# Altium PCB FMC_DIO_32ch_lvds_a.PcbDoc (part 2 of 6)
Units mm, origin at the board's own origin, x right, y up, seen from the top; angles counter-clockwise.
Board outline 69.13 x 77.46 mm, 4 copper layers (Top Layer, G, SUP, Bottom Layer), stack 1.448 mm thick; 558 components, 348 nets, 1996 pads, 784 vias.
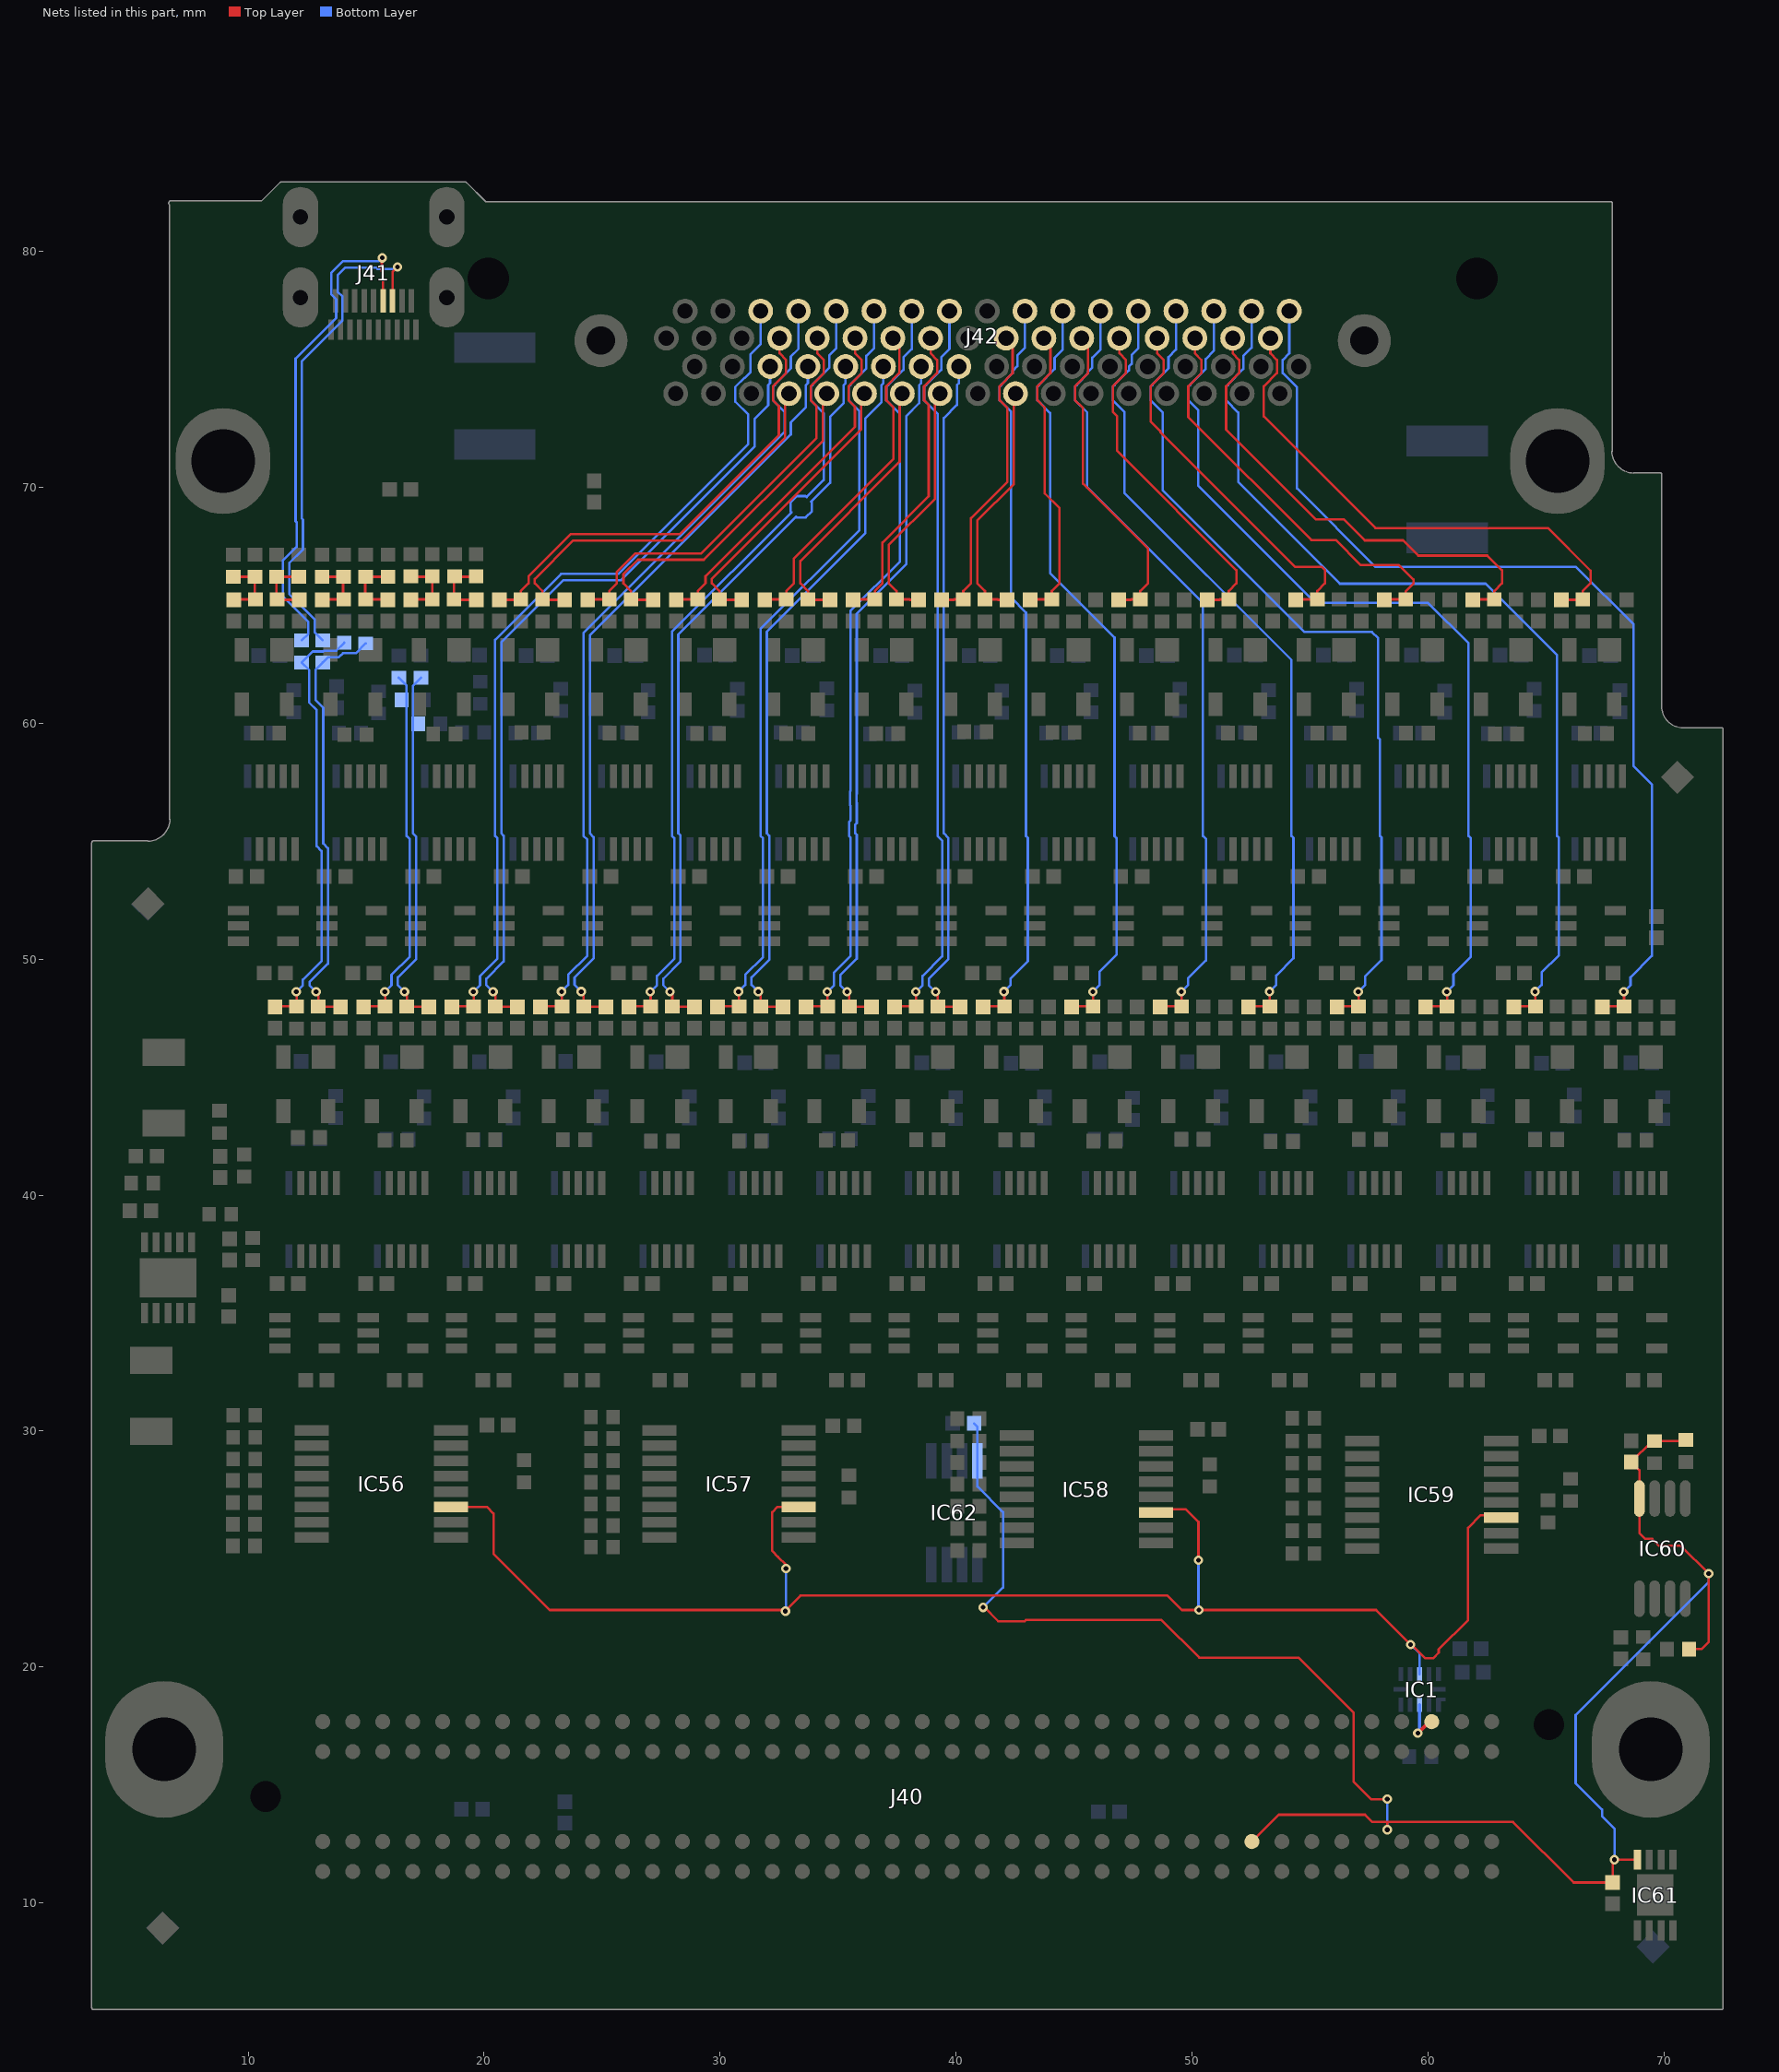
[diagram p4: the nets of this part, all layers, seen from the top]

## Components (designator, comment, footprint, x,y, rotation, side; value= is the part's Value field where it differs from the comment) (continued)
R1F "0" RESC1005X40N 21.234,43.713 r90 bottom (schematic designator R1)
R1G "0" RESC1005X40N 23.241,60.985 r90 bottom (schematic designator R1)
R1H "0" RESC1005X40N 24.968,43.713 r90 bottom (schematic designator R1)
R1I "0" RESC1005X40N 26.949,60.935 r90 bottom (schematic designator R1)
R1J "0" RESC1005X40N 28.702,43.713 r90 bottom (schematic designator R1)
R1K "0" RESC1005X40N 30.734,60.985 r90 bottom (schematic designator R1)
R1L "0" RESC1005X40N 32.461,43.713 r90 bottom (schematic designator R1)
R1M "0" RESC1005X40N 34.519,61.011 r90 bottom (schematic designator R1)
R1N "0" RESC1005X40N 36.271,43.739 r90 bottom (schematic designator R1)
R1O "0" RESC1005X40N 38.252,60.909 r90 bottom (schematic designator R1)
R1P "0" RESC1005X40N 39.98,43.688 r90 bottom (schematic designator R1)
R1Q "0" RESC1005X40N 41.935,60.909 r90 bottom (schematic designator R1)
R1R "0" RESC1005X40N 43.739,43.713 r90 bottom (schematic designator R1)
R1S "0" RESC1005X40N 45.72,60.935 r90 bottom (schematic designator R1)
R1T "0" RESC1005X40N 47.473,43.663 r90 bottom (schematic designator R1)
R1U "0" RESC1005X40N 49.479,60.985 r90 bottom (schematic designator R1)
R1V "0" RESC1005X40N 51.232,43.713 r90 bottom (schematic designator R1)
R1W "0" RESC1005X40N 53.238,60.935 r90 bottom (schematic designator R1)
R1X "0" RESC1005X40N 54.991,43.713 r90 bottom (schematic designator R1)
R1Y "0" RESC1005X40N 56.972,60.985 r90 bottom (schematic designator R1)
R1Z "0" RESC1005X40N 58.725,43.713 r90 bottom (schematic designator R1)
R2 "10k" RESC1005X40N 59.665,16.205 r180 bottom
R243[ "0" RESC1005X40N 59.973,64.779 r270 top (schematic designator R243)
R243\ "0" RESC1005X40N 61.723,47.529 r270 top (schematic designator R243)
R243] "0" RESC1005X40N 63.723,64.779 r270 top (schematic designator R243)
R243^ "0" RESC1005X40N 65.473,47.529 r270 top (schematic designator R243)
R243_ "0" RESC1005X40N 67.473,64.779 r270 top (schematic designator R243)
R243` "0" RESC1005X40N 69.223,47.529 r270 top (schematic designator R243)
R243A "0" RESC1005X40N 11.223,64.779 r270 top (schematic designator R243)
R243B "0" RESC1005X40N 12.973,47.529 r270 top (schematic designator R243)
R243C "0" RESC1005X40N 14.973,64.779 r270 top (schematic designator R243)
R243D "0" RESC1005X40N 16.723,47.529 r270 top (schematic designator R243)
R243E "0" RESC1005X40N 18.723,64.779 r270 top (schematic designator R243)
R243F "0" RESC1005X40N 20.473,47.529 r270 top (schematic designator R243)
R243G "0" RESC1005X40N 22.473,64.779 r270 top (schematic designator R243)
R243H "0" RESC1005X40N 24.223,47.529 r270 top (schematic designator R243)
R243I "0" RESC1005X40N 26.223,64.779 r270 top (schematic designator R243)
R243J "0" RESC1005X40N 27.973,47.529 r270 top (schematic designator R243)
R243K "0" RESC1005X40N 29.973,64.779 r270 top (schematic designator R243)
R243L "0" RESC1005X40N 31.723,47.529 r270 top (schematic designator R243)
R243M "0" RESC1005X40N 33.723,64.779 r270 top (schematic designator R243)
R243N "0" RESC1005X40N 35.473,47.529 r270 top (schematic designator R243)
R243O "0" RESC1005X40N 37.473,64.779 r270 top (schematic designator R243)
R243P "0" RESC1005X40N 39.223,47.529 r270 top (schematic designator R243)
R243Q "0" RESC1005X40N 41.223,64.779 r270 top (schematic designator R243)
R243R "0" RESC1005X40N 42.973,47.529 r270 top (schematic designator R243)
R243S "0" RESC1005X40N 44.973,64.779 r270 top (schematic designator R243)
R243T "0" RESC1005X40N 46.723,47.529 r270 top (schematic designator R243)
R243U "0" RESC1005X40N 48.723,64.779 r270 top (schematic designator R243)
R243V "0" RESC1005X40N 50.473,47.529 r270 top (schematic designator R243)
R243W "0" RESC1005X40N 52.473,64.779 r270 top (schematic designator R243)
R243X "0" RESC1005X40N 54.223,47.529 r270 top (schematic designator R243)
R243Y "0" RESC1005X40N 56.223,64.779 r270 top (schematic designator R243)
R243Z "0" RESC1005X40N 57.973,47.529 r270 top (schematic designator R243)
R244[ "49R9" RESC1005X40N 59.271,59.588 r180 bottom (schematic designator R244)
R244\ "49R9" RESC1005X40N 61.29,42.342 r180 bottom (schematic designator R244)
R244] "49R9" RESC1005X40N 63.005,59.563 r180 bottom (schematic designator R244)
R244^ "49R9" RESC1005X40N 64.999,42.393 r180 bottom (schematic designator R244)
R244_ "49R9" RESC1005X40N 66.84,59.588 r180 bottom (schematic designator R244)
R244` "49R9" RESC1005X40N 68.783,42.342 r180 bottom (schematic designator R244)
R244A "49R9" RESC1005X40N 10.579,59.588 r180 bottom (schematic designator R244)
R244B "49R9" RESC1005X40N 12.573,42.393 r180 bottom (schematic designator R244)
R244C "49R9" RESC1005X40N 14.313,59.588 r180 bottom (schematic designator R244)
R244D "49R9" RESC1005X40N 16.332,42.367 r180 bottom (schematic designator R244)
R244E "49R9" RESC1005X40N 19.533,59.614 r180 bottom (schematic designator R244)
R244F "49R9" RESC1005X40N 20.015,42.342 r180 bottom (schematic designator R244)
R244G "49R9" RESC1005X40N 21.806,59.588 r180 bottom (schematic designator R244)
R244H "49R9" RESC1005X40N 23.825,42.342 r180 bottom (schematic designator R244)
R244I "49R9" RESC1005X40N 25.59,59.614 r180 bottom (schematic designator R244)
R244J "49R9" RESC1005X40N 27.534,42.291 r180 bottom (schematic designator R244)
R244K "49R9" RESC1005X40N 29.324,59.588 r180 bottom (schematic designator R244)
R244L "49R9" RESC1005X40N 31.318,42.316 r180 bottom (schematic designator R244)
R244M "49R9" RESC1005X40N 33.033,59.614 r180 bottom (schematic designator R244)
R244N "49R9" RESC1005X40N 35.077,42.393 r180 bottom (schematic designator R244)
R244O "49R9" RESC1005X40N 36.817,59.538 r180 bottom (schematic designator R244)
R244P "49R9" RESC1005X40N 38.786,42.342 r180 bottom (schematic designator R244)
R244Q "49R9" RESC1005X40N 40.576,59.614 r180 bottom (schematic designator R244)
R244R "49R9" RESC1005X40N 42.57,42.316 r180 bottom (schematic designator R244)
R244S "49R9" RESC1005X40N 44.285,59.588 r180 bottom (schematic designator R244)
R244T "49R9" RESC1005X40N 46.33,42.367 r180 bottom (schematic designator R244)
R244U "49R9" RESC1005X40N 48.069,59.588 r180 bottom (schematic designator R244)
R244V "49R9" RESC1005X40N 50.013,42.367 r180 bottom (schematic designator R244)
R244W "49R9" RESC1005X40N 51.778,59.614 r180 bottom (schematic designator R244)
R244X "49R9" RESC1005X40N 53.797,42.316 r180 bottom (schematic designator R244)
R244Y "49R9" RESC1005X40N 55.512,59.588 r180 bottom (schematic designator R244)
R244Z "49R9" RESC1005X40N 57.531,42.342 r180 bottom (schematic designator R244)
R245[ "49R9" RESC1005X40N 59.538,59.588 r180 top (schematic designator R245)
R245\ "49R9" RESC1005X40N 61.29,42.316 r180 top (schematic designator R245)
R245] "49R9" RESC1005X40N 63.297,59.538 r180 top (schematic designator R245)
R245^ "49R9" RESC1005X40N 64.999,42.342 r180 top (schematic designator R245)
R245_ "49R9" RESC1005X40N 67.107,59.563 r180 top (schematic designator R245)
R245` "49R9" RESC1005X40N 68.783,42.316 r180 top (schematic designator R245)
R245A "49R9" RESC1005X40N 10.846,59.588 r180 top (schematic designator R245)
R245B "49R9" RESC1005X40N 12.573,42.443 r180 top (schematic designator R245)
R245C "49R9" RESC1005X40N 14.554,59.512 r180 top (schematic designator R245)
R245D "49R9" RESC1005X40N 16.256,42.316 r180 top (schematic designator R245)
R245E "49R9" RESC1005X40N 18.313,59.538 r180 top (schematic designator R245)
R245F "49R9" RESC1005X40N 19.99,42.342 r180 top (schematic designator R245)
R245G "49R9" RESC1005X40N 22.047,59.614 r180 top (schematic designator R245)
R245H "49R9" RESC1005X40N 23.8,42.342 r180 top (schematic designator R245)
R245I "49R9" RESC1005X40N 25.781,59.588 r180 top (schematic designator R245)
R245J "49R9" RESC1005X40N 27.534,42.291 r180 top (schematic designator R245)
R245K "49R9" RESC1005X40N 29.489,59.563 r180 top (schematic designator R245)
R245L "49R9" RESC1005X40N 31.267,42.291 r180 top (schematic designator R245)
R245M "49R9" RESC1005X40N 33.274,59.563 r180 top (schematic designator R245)
R245N "49R9" RESC1005X40N 34.95,42.316 r180 top (schematic designator R245)
R245O "49R9" RESC1005X40N 37.084,59.563 r180 top (schematic designator R245)
R245P "49R9" RESC1005X40N 38.786,42.342 r180 top (schematic designator R245)
R245Q "49R9" RESC1005X40N 40.818,59.639 r180 top (schematic designator R245)
R245R "49R9" RESC1005X40N 42.545,42.342 r180 top (schematic designator R245)
R245S "49R9" RESC1005X40N 44.552,59.614 r180 top (schematic designator R245)
R245T "49R9" RESC1005X40N 46.279,42.291 r180 top (schematic designator R245)
R245U "49R9" RESC1005X40N 48.26,59.588 r180 top (schematic designator R245)
R245V "49R9" RESC1005X40N 50.013,42.367 r180 top (schematic designator R245)
R245W "49R9" RESC1005X40N 51.994,59.588 r180 top (schematic designator R245)
R245X "49R9" RESC1005X40N 53.797,42.266 r180 top (schematic designator R245)
R245Y "49R9" RESC1005X40N 55.778,59.588 r180 top (schematic designator R245)
R245Z "49R9" RESC1005X40N 57.531,42.367 r180 top (schematic designator R245)
R246[ "0" RESC1005X40N 59.054,64.78 r270 top (schematic designator R246)
R246\ "0" RESC1005X40N 60.804,47.53 r270 top (schematic designator R246)
R246] "0" RESC1005X40N 62.804,64.78 r270 top (schematic designator R246)
R246^ "0" RESC1005X40N 64.554,47.53 r270 top (schematic designator R246)
R246_ "0" RESC1005X40N 66.554,64.78 r270 top (schematic designator R246)
R246` "0" RESC1005X40N 68.304,47.53 r270 top (schematic designator R246)
R246A "0" RESC1005X40N 10.304,64.78 r270 top (schematic designator R246)
R246B "0" RESC1005X40N 12.054,47.53 r270 top (schematic designator R246)
R246C "0" RESC1005X40N 14.054,64.78 r270 top (schematic designator R246)
R246D "0" RESC1005X40N 15.804,47.53 r270 top (schematic designator R246)
R246E "0" RESC1005X40N 17.804,64.78 r270 top (schematic designator R246)
R246F "0" RESC1005X40N 19.554,47.53 r270 top (schematic designator R246)
R246G "0" RESC1005X40N 21.554,64.78 r270 top (schematic designator R246)
R246H "0" RESC1005X40N 23.304,47.53 r270 top (schematic designator R246)
R246I "0" RESC1005X40N 25.304,64.78 r270 top (schematic designator R246)
R246J "0" RESC1005X40N 27.054,47.53 r270 top (schematic designator R246)
R246K "0" RESC1005X40N 29.054,64.78 r270 top (schematic designator R246)
R246L "0" RESC1005X40N 30.804,47.53 r270 top (schematic designator R246)
R246M "0" RESC1005X40N 32.804,64.78 r270 top (schematic designator R246)
R246N "0" RESC1005X40N 34.554,47.53 r270 top (schematic designator R246)
R246O "0" RESC1005X40N 36.554,64.78 r270 top (schematic designator R246)
R246P "0" RESC1005X40N 38.304,47.53 r270 top (schematic designator R246)
R246Q "0" RESC1005X40N 40.304,64.78 r270 top (schematic designator R246)
R246R "0" RESC1005X40N 42.054,47.53 r270 top (schematic designator R246)
R246S "0" RESC1005X40N 44.054,64.78 r270 top (schematic designator R246)
R246T "0" RESC1005X40N 45.804,47.53 r270 top (schematic designator R246)
R246U "0" RESC1005X40N 47.804,64.78 r270 top (schematic designator R246)
R246V "0" RESC1005X40N 49.554,47.53 r270 top (schematic designator R246)
R246W "0" RESC1005X40N 51.554,64.78 r270 top (schematic designator R246)
R246X "0" RESC1005X40N 53.304,47.53 r270 top (schematic designator R246)
R246Y "0" RESC1005X40N 55.304,64.78 r270 top (schematic designator R246)
R246Z "0" RESC1005X40N 57.054,47.53 r270 top (schematic designator R246)
R251 "10k" RESC1005X40N 8.814,39.192 r0 top
R252 "10" RESC1005X40N 5.512,40.513 r180 top
R253 "10k" RESC1005X40N 10.185,37.719 r90 top
R254 "100" RESC1005X40N 8.788,43.104 r90 top
R255 "100" RESC1005X40N 9.83,41.25 r90 top
R256 "47k" RESC1005X40N 21.692,28.296 r270 top
R257 "47k" RESC1005X40N 9.83,30.674 r180 top
R258 "47k" RESC1005X40N 9.83,29.734 r180 top
R259 "47k" RESC1005X40N 9.83,28.82 r180 top
R260 "47k" RESC1005X40N 9.822,27.905 r180 top
R261 "47k" RESC1005X40N 9.822,26.966 r180 top
R262 "47k" RESC1005X40N 9.822,26.051 r180 top
R263 "47k" RESC1005X40N 9.822,25.137 r180 top
R264 "47k" RESC1005X40N 35.458,27.661 r270 top
R265 "0" RESC1005X40N 11.201,66.675 r270 top
R266 "0" RESC1005X40N 12.141,66.675 r90 top
R267 "0" RESC1005X40N 9.373,66.675 r270 top
R268 "0" RESC1005X40N 10.287,66.675 r90 top
R269 "47k" RESC1005X40N 24.994,30.598 r180 top
R270 "0" RESC1005X40N 13.157,63.043 r270 bottom
R271 "0" RESC1005X40N 14.986,63.856 r90 bottom
R272 "0" RESC1005X40N 14.072,63.881 r270 bottom
R273 "0" RESC1005X40N 12.268,63.043 r90 bottom
R274 "47k" RESC1005X40N 24.994,29.683 r180 top
R275 "0" RESC1005X40N 14.986,66.675 r270 top
R276 "0" RESC1005X40N 15.926,66.675 r90 top
R277 "0" RESC1005X40N 13.132,66.675 r270 top
R278 "0" RESC1005X40N 14.046,66.675 r90 top
R279 "47k" RESC1005X40N 24.994,28.743 r180 top
R280 "0" RESC1005X40N 17.323,62.395 r270 bottom
R281 "0" RESC1005X40N 17.678,59.969 r0 bottom
R282 "0" RESC1005X40N 16.967,60.985 r180 bottom
R283 "0" RESC1005X40N 16.383,62.395 r90 bottom
R284 "47k" RESC1005X40N 24.994,27.829 r180 top
R285 "0" RESC1005X40N 18.745,66.7 r270 top
R286 "0" RESC1005X40N 19.66,66.7 r90 top
R287 "0" RESC1005X40N 16.891,66.7 r270 top
R288 "0" RESC1005X40N 17.805,66.7 r90 top
R289 "47k" RESC1005X40N 24.994,26.915 r180 top
R290 "47k" RESC1005X40N 24.994,26 r180 top
R291 "47k" RESC1005X40N 24.994,25.086 r180 top
R292 "47k" RESC1005X40N 50.749,28.118 r270 top
R293 "47k" RESC1005X40N 40.513,30.521 r180 top
R294 "47k" RESC1005X40N 40.513,29.582 r180 top
R295 "47k" RESC1005X40N 40.513,28.667 r180 top
R296 "47k" RESC1005X40N 40.513,27.753 r180 top
R297 "47k" RESC1005X40N 40.513,26.813 r180 top
R298 "47k" RESC1005X40N 40.513,25.873 r180 top
R299 "47k" RESC1005X40N 40.513,24.933 r180 top
R300 "47k" RESC1005X40N 66.04,27.508 r270 top
R301 "47k" RESC1005X40N 54.712,30.547 r180 top
R302 "47k" RESC1005X40N 54.712,29.582 r180 top
R303 "47k" RESC1005X40N 54.712,28.642 r180 top
R304 "47k" RESC1005X40N 54.712,27.702 r180 top
R305 "47k" RESC1005X40N 54.712,26.737 r180 top
R306 "47k" RESC1005X40N 54.712,25.772 r180 top
R307 "47k" RESC1005X40N 54.712,24.811 r180 top
R308 "100k" RESC1005X40N 65.075,26.594 r90 top
R309 "100k" RESC1005X40N 69.113,20.803 r90 top
R310 "10k" RESC1005X40N 69.596,29.108 r90 top
R311 "10k" RESC1005X40N 70.594,20.761 r0 top
R312 "10k" RESC1005X40N 70.917,29.159 r90 top

## Footprints (in the part's own frame and the unit in brackets; to place one, negate y for a bottom-side part, rotate by r counter-clockwise, add the part's x,y. Pads: shape width x height; smd on the part's side, far side on the other; paste and mask are expansions set on the pad)
CAPC1005X55N [mm] "Chip Capacitor, Body 1.0x0.55mm, IPC Medium Density"
  rect 0.62x0.62 smd: 1(-0.45,0) 2(0.45,0)
  body extent -0.52,-0.27 0.53,0.28, height 0.55
CAPC3216X180N [mm] "Chip Capacitor, Body 3.2x1.6mm, IPC Medium Density"
  rect 1.15x1.8 smd: 1(-1.5,0) 2(1.5,0)
  silkscreen extent -0.55,-0.8 0.55,0.8, body extent -1.7,-0.9 1.7,0.9, height 1.8
FIDUCIAL_TOP_S100-200 [mm] "Square Fiducial Target, Top Layer, 1.0mm, Top Solder 2.0mm, Keepout =2.0mm"
  rect 1x1 smd rot 45 paste-0.51 mask+0.5: 1(0,0)
  Top Layer keep-out region: 1.414,0 0,-1.414 -1.414,0 0,1.414
FUSRC4632X90N [mm] "Chip Resettable Fuse, 2-Leads, Body 4.6x3.2mm, IPC Medium Density"
  rect 1.3x3.45 smd: 1(-2.05,0) 2(2.05,0)
  silkscreen extent -1,-1.7 1,1.7, body extent -2.36,-1.7 2.37,1.71, height 0.89
MOLEX_46765-1001 [mm] "0.4mm Pitch, Surface Mount Right Angle 19 Contacts Micro HDMI Type-D Receptacle With Kapton Tape  And Thru Hole Mounting Pads"
  rect 0.23x0.85 smd: 1(1.8,0.613) 3(1.4,0.613) 5(1,0.613) 7(0.6,0.613) 9(0.2,0.613) 11(-0.2,0.613) 13(-0.6,0.613) 15(-1,0.613) 17(-1.4,0.613) 19(-1.8,0.613)
  rect 0.23x1 smd: 2(1.6,-0.613) 4(1.2,-0.613) 6(0.8,-0.613) 8(0.4,-0.613) 10(0,-0.613) 12(-0.4,-0.613) 14(-0.8,-0.613) 16(-1.2,-0.613) 18(-1.6,-0.613)
  oval 1.5x2.55 hole 0.65 slot 1.7 at 90 deg: SHIELD(-3.1,-0.753) SHIELD(-3.1,-4.163) SHIELD(3.1,-0.753) SHIELD(3.1,-4.163)
  silkscreen extent -3.25,-6.56 3.25,-5.86, body extent -3.25,-6.56 3.25,0.94, height 2.97
MOLEX_71430-0013 [mm] "68 Positions, Pitch 0.8mm, Very Hight Density Right Angle Receptacle, VHDCI Standard (Recommended PCB Thickness: 1.6mm)"
  round 1.05 hole 0.65: 1(-13.005,-1.75) 2(-12.205,-0.6) 3(-11.405,-1.75) 4(-10.605,-0.6) 5(-9.805,-1.75) 6(-9.005,-0.6) 7(-8.205,-1.75) 8(-7.405,-0.6) 9(-6.605,-1.75) 10(-5.805,-0.6) 11(-5.005,-1.75) 12(-4.205,-0.6) 13(-3.405,-1.75) 14(-2.605,-0.6) 15(-1.805,-1.75) 16(-1.005,-0.6) 17(-0.205,-1.75) 18(0.595,-0.6) 19(1.395,-1.75) 20(2.195,-0.6) 21(2.995,-1.75) 22(3.795,-0.6) 23(4.595,-1.75) 24(5.395,-0.6) 25(6.195,-1.75) 26(6.995,-0.6) 27(7.795,-1.75) 28(8.595,-0.6) 29(9.395,-1.75) 30(10.195,-0.6) 31(10.995,-1.75) 32(11.795,-0.6) 33(12.595,-1.75) 34(13.395,-0.6) 35(-13.405,0.6) 36(-12.605,1.75) 37(-11.805,0.6) 38(-11.005,1.75) 39(-10.205,0.6) 40(-9.405,1.75) 41(-8.605,0.6) 42(-7.805,1.75) 43(-7.005,0.6) 44(-6.205,1.75) 45(-5.405,0.6) 46(-4.605,1.75) 47(-3.805,0.6) 48(-3.005,1.75) 49(-2.205,0.6) 50(-1.405,1.75) 51(-0.605,0.6) 52(0.195,1.75) 53(0.995,0.6) 54(1.795,1.75) 55(2.595,0.6) 56(3.395,1.75) 57(4.195,0.6) 58(4.995,1.75) 59(5.795,0.6) 60(6.595,1.75) 61(7.395,0.6) 62(8.195,1.75) 63(8.995,0.6) 64(9.795,1.75) 65(10.595,0.6) 66(11.395,1.75) 67(12.195,0.6) 68(12.995,1.75)
  round 2.25 hole 1.2: 69(-16.175,0.5) 70(16.175,0.5)
  round 1 hole 1.75 unplated mask+0.375: 71(-20.95,3.13) 72(20.95,3.13)
  silkscreen extent -21.35,-2.4 21.35,12.25, body extent -21.35,-2.4 21.35,12.25, height 6.28
msop-8 [mm]
  oval 1.55x0.45 smd: 1(-2.125,0.975) 2(-2.125,0.325) 3(-2.125,-0.325) 4(-2.125,-0.975) 5(2.125,-0.975) 6(2.125,-0.325) 7(2.125,0.325) 8(2.125,0.975)
  silkscreen extent -2.25,-1.5 0.95,1.87, body extent -2.35,-1.53 2.55,1.57, height 1.09
MTG300_600#1 [mm] "Plated Through Hole: Hole Dia.=3.0mm Pad Dia.=6.0mm"
  oval 5.8x5 hole 2.7: 1(0,0)
MTG300_600#2 [mm] "Plated Through Hole: Hole Dia.=3.0mm Pad Dia.=6.0mm"
  oval 4.5x4 hole 2.7: 1(0,0)
RESC1005X40N [mm] "Chip Resistor, EIA 0402, Metric 1005, Body 1.0x0.5mm, IPC Medium Density"
  rect 0.58x0.62 smd: 1(-0.47,0) 2(0.47,0)
  body extent -0.52,-0.27 0.53,0.28, height 0.4
SAMTEC_ASP-127797-01 [mm] "Connector VITA 57, 160 Male contacts in 4 row cdgh"
  round 1 hole 1.3 unplated mask+0.3: 1(-27.191,-3.048) 2(27.191,0)
  round 0.64 smd: c1(24.765,3.175) c2(23.495,3.175) c3(22.225,3.175) c4(20.955,3.175) c5(19.685,3.175) c6(18.415,3.175) c7(17.145,3.175) c8(15.875,3.175) c9(14.605,3.175) c10(13.335,3.175) c11(12.065,3.175) c12(10.795,3.175) c13(9.525,3.175) c14(8.255,3.175) c15(6.985,3.175) c16(5.715,3.175) c17(4.445,3.175) c18(3.175,3.175) c19(1.905,3.175) c20(0.635,3.175) c21(-0.635,3.175) c22(-1.905,3.175) c23(-3.175,3.175) c24(-4.445,3.175) c25(-5.715,3.175) c26(-6.985,3.175) c27(-8.255,3.175) c28(-9.525,3.175) c29(-10.795,3.175) c30(-12.065,3.175) c31(-13.335,3.175) c32(-14.605,3.175) c33(-15.875,3.175) c34(-17.145,3.175) c35(-18.415,3.175) c36(-19.685,3.175) c37(-20.955,3.175) c38(-22.225,3.175) c39(-23.495,3.175) c40(-24.765,3.175) d1(24.765,1.905) d2(23.495,1.905) d3(22.225,1.905) d4(20.955,1.905) d5(19.685,1.905) d6(18.415,1.905) d7(17.145,1.905) d8(15.875,1.905) d9(14.605,1.905) d10(13.335,1.905) d11(12.065,1.905) d12(10.795,1.905) d13(9.525,1.905) d14(8.255,1.905) d15(6.985,1.905) d16(5.715,1.905) d17(4.445,1.905) d18(3.175,1.905) d19(1.905,1.905) d20(0.635,1.905) d21(-0.635,1.905) d22(-1.905,1.905) d23(-3.175,1.905) d24(-4.445,1.905) d25(-5.715,1.905) d26(-6.985,1.905) d27(-8.255,1.905) d28(-9.525,1.905) d29(-10.795,1.905) d30(-12.065,1.905) d31(-13.335,1.905) d32(-14.605,1.905) d33(-15.875,1.905) d34(-17.145,1.905) d35(-18.415,1.905) d36(-19.685,1.905) d37(-20.955,1.905) d38(-22.225,1.905) d39(-23.495,1.905) d40(-24.765,1.905) g1(24.765,-1.905) g2(23.495,-1.905) g3(22.225,-1.905) g4(20.955,-1.905) g5(19.685,-1.905) g6(18.415,-1.905) g7(17.145,-1.905) g8(15.875,-1.905) g9(14.605,-1.905) g10(13.335,-1.905) g11(12.065,-1.905) g12(10.795,-1.905) g13(9.525,-1.905) g14(8.255,-1.905) g15(6.985,-1.905) g16(5.715,-1.905) g17(4.445,-1.905) g18(3.175,-1.905) g19(1.905,-1.905) g20(0.635,-1.905) g21(-0.635,-1.905) g22(-1.905,-1.905) g23(-3.175,-1.905) g24(-4.445,-1.905) g25(-5.715,-1.905) g26(-6.985,-1.905) g27(-8.255,-1.905) g28(-9.525,-1.905) g29(-10.795,-1.905) g30(-12.065,-1.905) g31(-13.335,-1.905) g32(-14.605,-1.905) g33(-15.875,-1.905) g34(-17.145,-1.905) g35(-18.415,-1.905) g36(-19.685,-1.905) g37(-20.955,-1.905) g38(-22.225,-1.905) g39(-23.495,-1.905) g40(-24.765,-1.905) h1(24.765,-3.175) h2(23.495,-3.175) h3(22.225,-3.175) h4(20.955,-3.175) h5(19.685,-3.175) h6(18.415,-3.175) h7(17.145,-3.175) h8(15.875,-3.175) h9(14.605,-3.175) h10(13.335,-3.175) h11(12.065,-3.175) h12(10.795,-3.175) h13(9.525,-3.175) h14(8.255,-3.175) h15(6.985,-3.175) h16(5.715,-3.175) h17(4.445,-3.175) h18(3.175,-3.175) h19(1.905,-3.175) h20(0.635,-3.175) h21(-0.635,-3.175) h22(-1.905,-3.175) h23(-3.175,-3.175) h24(-4.445,-3.175) h25(-5.715,-3.175) h26(-6.985,-3.175) h27(-8.255,-3.175) h28(-9.525,-3.175) h29(-10.795,-3.175) h30(-12.065,-3.175) h31(-13.335,-3.175) h32(-14.605,-3.175) h33(-15.875,-3.175) h34(-17.145,-3.175) h35(-18.415,-3.175) h36(-19.685,-3.175) h37(-20.955,-3.175) h38(-22.225,-3.175) h39(-23.495,-3.175) h40(-24.765,-3.175)
  silkscreen extent -27.89,-7.34 28.38,7.34, body extent -27.89,-7.34 28.78,7.34, height 5.61
SON50P300X200X100-9N-S175X155 [mm] "SON (DFN), 0.50mm pitch, 8 pin, 2mm X 3mm X 1.00mm H body (w/thermal tab 1.75 X 1.55mm),  IPC Medium Density"
  rect 0.85x0.3 smd: 1(-1.5,0.75) 2(-1.5,0.25) 3(-1.5,-0.25) 4(-1.5,-0.75) 5(1.5,-0.75) 6(1.5,-0.25) 7(1.5,0.25) 8(1.5,0.75)
  rect 1.75x1.55 smd: 9(0,0)
  silkscreen extent -2.52,0.63 -2.28,0.87, body extent -1.5,-1 1.5,1, height 1.02
SOP65P490X110-8N [mm] "SOP, 0.65mm pitch; 8 pin, 3.00mm W X 3.00mm L X 1.10mm H body, IPC Medium Density"
  rect 1.5x0.45 smd: 1(-2.2,0.975) 2(-2.2,0.325) 3(-2.2,-0.325) 4(-2.2,-0.975) 5(2.2,-0.975) 6(2.2,-0.325) 7(2.2,0.325) 8(2.2,0.975)
  silkscreen extent -2.82,-1.5 1.12,1.83, body extent -2.45,-1.55 2.45,1.55, height 1.1
SOP65P640X120-16N [mm] "SOP, 0.65mm pitch; 16 pin, 4.40mm W X 5.00mm L X 1.20mm H body IPC Medium Density"
  rect 1.45x0.45 smd: 1(-2.95,2.275) 2(-2.95,1.625) 3(-2.95,0.975) 4(-2.95,0.325) 5(-2.95,-0.325) 6(-2.95,-0.975) 7(-2.95,-1.625) 8(-2.95,-2.275) 9(2.95,-2.275) 10(2.95,-1.625) 11(2.95,-0.975) 12(2.95,-0.325) 13(2.95,0.325) 14(2.95,0.975) 15(2.95,1.625) 16(2.95,2.275)
  silkscreen extent -3.07,-2.55 1.85,3.17, body extent -3.12,-2.55 3.12,2.55, height 1.2
SOT65P212X110-5N [mm] "SOT353, SOT, 0.65mm Pitch, 5 pin, 1.25mm W X 2.05mm L X 1.10mm H, IPC Medium Density"
  rect 0.9x0.4 smd: 1(-1.05,0.65) 2(-1.05,0) 3(-1.05,-0.65) 4(1.05,-0.65) 5(1.05,0.65)
  silkscreen extent -1.37,-1.05 0.28,1.47, body extent -1.2,-1.1 1.2,1.1, height 1.1
SOT190P230X110-4N [mm] "SOT143, SOT, 1.90mm Pitch; 4 Pin, 1.30mm W X 2.90mm L X 1.10mm H body, IPC Medium Density"
  rect 1x1 smd: 1(-1.15,0.75)
  rect 1x0.6 smd: 2(-1.15,-0.95) 3(1.15,-0.95) 4(1.15,0.95)
  silkscreen extent -1.52,-1.45 0.33,1.88, body extent -1.25,-1.5 1.25,1.5, height 1.1
"TEXAS_DRC (S-PVSON-N10)" [mm] "SON, TEXAS DRC (S-PVSON-N10), 0.50mm Pitch, 10-pin, 3.00mm W  X 3.00mm L X 1.00mm Height, (w/thermal tab 1.65 X 2.40 mm)"
  rect 0.85x0.3 smd: 1(-1.5,1) 2(-1.5,0.5) 3(-1.5,0) 4(-1.5,-0.5) 5(-1.5,-1) 6(1.5,-1) 7(1.5,-0.5) 8(1.5,0) 9(1.5,0.5) 10(1.5,1)
  rect 1.65x2.4 smd: 11(0,0)
  Top Layer region: -0.825,1.2 -0.39,1.2 -0.39,1.9 -0.11,1.9 -0.11,1.2 0.11,1.2 0.11,1.9 0.39,1.9 0.39,1.2 0.825,1.2 0.825,-1.2 0.39,-1.2 0.39,-1.9 0.11,-1.9 0.11,-1.2 -0.11,-1.2 -0.11,-1.9 -0.39,-1.9 -0.39,-1.2 -0.825,-1.2
  silkscreen extent -2.52,0.88 -2.28,1.13, body extent -1.57,-1.57 1.58,1.58, height 1
"TEXAS_RUT (R-PUQFN-N12)" [mm] "SON, TEXAS RUT (R-PUQFN-N12), 0.50mm Pitch, 12-pin, 1.70mm W  X 2.00mm L X 0.55mm Height"
  rect 0.6x0.2 smd: 1(-0.65,0.8) 2(-0.65,0.4) 3(-0.65,0) 4(-0.65,-0.4) 5(-0.65,-0.8) 7(0.65,-0.8) 8(0.65,-0.4) 9(0.65,0) 10(0.65,0.4) 11(0.65,0.8)
  rect 0.15x0.2 smd: 1(-0.425,1)
  rect 0.2x0.6 smd: 6(0,-0.8) 12(0,0.8)
  silkscreen extent -1.55,0.65 -1.3,0.9, body extent -0.9,-1.05 0.9,1.05, height 0.55
US8 [mm] "SOP, 0.50mm pitch; 8 pin, 2.30mm W X 2.00mm L X 0.90mm H body, PC Medium Density"
  rect 1x0.3 smd: 1(-1.55,0.75) 2(-1.55,0.25) 3(-1.55,-0.25) 4(-1.55,-0.75) 5(1.55,-0.75) 6(1.55,-0.25) 7(1.55,0.25) 8(1.55,0.75)
  silkscreen extent -1.82,-1 0.8,1.52, body extent -1.62,-1 1.62,1, height 0.9

## Part data
B8 B9 B10 B11: library part PLATED_HOLE3.0_PAD6.0, "Single Terminal Socket"
C1 C2 C157 C158 C159 C160 C161 C162 C163 C164: library part CC0402_100NF_16V_10%_X7R, "Non-polarised capacitor"
C127[ C127\ C127] C127^ C127_ C127` C127A C127B C127C C127D C127E C127F C127G C127H C127I C127J C127K C127L C127M C127N C127O C127P C127Q C127R C127S C127T C127U C127V C127W C127X C127Y C127Z C128[ C128\ C128] C128^ C128_ C128` C128A C128B C128C C128D C128E C128F C128G C128H C128I C128J C128K C128L C128M C128N C128O C128P C128Q C128R C128S C128T C128U C128V C128W C128X C128Y C128Z C139[ C139\ C139] C139^ C139_ C139` C139A C139B C139C C139D C139E C139F C139G C139H C139I C139J C139K C139L C139M C139N C139O C139P C139Q C139R C139S C139T C139U C139V C139W C139X C139Y C139Z C140[ C140\ C140] C140^ C140_ C140` C140A C140B C140C C140D C140E C140F C140G C140H C140I C140J C140K C140L C140M C140N C140O C140P C140Q C140R C140S C140T C140U C140V C140W C140X C140Y C140Z C141[ C141\ C141] C141^ C141_ C141` C141A C141B C141C C141D C141E C141F C141G C141H C141I C141J C141K C141L C141M C141N C141O C141P C141Q C141R C141S C141T C141U C141V C141W C141X C141Y C141Z C146 C149 C151 C152 C153 C154 C155 C156 C165 C166: library part CC0402_100NF_16V_10%_X5R, "Non-polarised capacitor"
C147 C148: library part CC1206_22UF_10V_10%_X7R, "Non-polarised capacitor"
C150: library part CC0402_15PF_50V_5%_NP0, "Non-polarised capacitor"
D12[ D12\ D12] D12^ D12_ D12` D12A D12B D12C D12D D12E D12F D12G D12H D12I D12J D12K D12L D12M D12N D12O D12P D12Q D12R D12S D12T D12U D12V D12W D12X D12Y D12Z: "Ultra Low Capacitance Double Rail-to-Rail ESD Protection Diode"
F6 F7: library part FUSR1812_TYCO-MINISMDC014F, "Fuse"
FTG7 FTG8 FTG9 FTG10 FTG11 FTG12: library part FIDUCIAL_TARGET_S100-200, "Fiducial Target"
IC1: "4-bit Bidirectional Auto-direction Sensing Translator with Fully Symmetric 0.9V to 3.6V Range"
IC49[ IC49\ IC49] IC49^ IC49_ IC49` IC49A IC49B IC49C IC49D IC49E IC49F IC49G IC49H IC49I IC49J IC49K IC49L IC49M IC49N IC49O IC49P IC49Q IC49R IC49S IC49T IC49U IC49V IC49W IC49X IC49Y IC49Z IC50[ IC50\ IC50] IC50^ IC50_ IC50` IC50A IC50B IC50C IC50D IC50E IC50F IC50G IC50H IC50I IC50J IC50K IC50L IC50M IC50N IC50O IC50P IC50Q IC50R IC50S IC50T IC50U IC50V IC50W IC50X IC50Y IC50Z: library part IFC_FIN1101K8X, "LVDS TO LVDS repeater3.3V"
IC51[ IC51\ IC51] IC51^ IC51_ IC51` IC51A IC51B IC51C IC51D IC51E IC51F IC51G IC51H IC51I IC51J IC51K IC51L IC51M IC51N IC51O IC51P IC51Q IC51R IC51S IC51T IC51U IC51V IC51W IC51X IC51Y IC51Z: "Single Inverter Buffer"
IC55: "Sink/Source DDR Termination Regulator"
IC56 IC57 IC58 IC59: "8-Bit Shift Register With 3-State Output Register"
IC60: library part IIC_TCA4311A, "HOT SWAPPABLE 2-WIRE BUS BUFFERS"
IC61: "1.7-5.5V 64K I2C Serial EEPROM"
IC62: "2-Wire High-Accuracy Temperature Sensor"
J40: library part SAMTEC_ASP-127797-01, "Connector VITA 57, 160 Male contacts in 4 row cdgh"
J41: library part MOLEX_46765-1001, "Connector HDMI 19 Male + 1 Shield"
J42: library part MOLEX_71430-0013, "Very High Density Cable Interconnect (VHDCI ) 68 Female"
R1[ R1\ R1] R1^ R1_ R1` R1A R1B R1C R1D R1E R1F R1G R1H R1I R1J R1K R1L R1M R1N R1O R1P R1Q R1R R1S R1T R1U R1V R1W R1X R1Y R1Z R243[ R243\ R243] R243^ R243_ R243` R243A R243B R243C R243D R243E R243F R243G R243H R243I R243J R243K R243L R243M R243N R243O R243P R243Q R243R R243S R243T R243U R243V R243W R243X R243Y R243Z R246[ R246\ R246] R246^ R246_ R246` R246A R246B R246C R246D R246E R246F R246G R246H R246I R246J R246K R246L R246M R246N R246O R246P R246Q R246R R246S R246T R246U R246V R246W R246X R246Y R246Z R265 R266 R267 R268 R270 R271 R272 R273 R275 R276 R277 R278 R280 R281 R282 R283 R285 R286 R287 R288: library part R0402_0R_JUMPER, "Resistor"
R2 R251 R253 R310 R311 R312: library part R0402_10K_1%_0.0625W_100PPM, "Resistor - 1%"
R244[ R244\ R244] R244^ R244_ R244` R244A R244B R244C R244D R244E R244F R244G R244H R244I R244J R244K R244L R244M R244N R244O R244P R244Q R244R R244S R244T R244U R244V R244W R244X R244Y R244Z R245[ R245\ R245] R245^ R245_ R245` R245A R245B R245C R245D R245E R245F R245G R245H R245I R245J R245K R245L R245M R245N R245O R245P R245Q R245R R245S R245T R245U R245V R245W R245X R245Y R245Z: library part R0402_49R9_1%_0.0625W_100PPM, "Resistor - 1%"
R252: library part R0402_10R_1%_0.0625W_200PPM, "Resistor - 1%"
R254 R255: library part R0402_100R_1%_0.0625W_100PPM, "Resistor - 1%"
R256 R257 R258 R259 R260 R261 R262 R263 R264 R269 R274 R279 R284 R289 R290 R291 R292 R293 R294 R295 R296 R297 R298 R299 R300 R301 R302 R303 R304 R305 R306 R307: library part R0402_47K_1%_0.0625W_100PPM, "Resistor - 1%"
R308 R309: library part R0402_100K_1%_0.0625W_100PPM, "Resistor - 1%"

## Via types
v1: diameter 0.4, hole 0.2, Top Layer to Bottom Layer, tented both sides, 760 vias
v2: diameter 0.4, hole 0.2, Top Layer to Bottom Layer, 24 vias

## Nets (pads, with @x,y where several pads share a name; then routed paths per layer and width w, separated by ;. In a path a pad name is that pad's centre, name@x,y a point inside that pad or via, vN(x,y) a via of type N, cw(c..) or ccw(c..) an arc to the next point about the centre after c; other vN are vias at no path point)
3P3VAUX: C164.2 C165.2 C166.2 IC60.8 IC61.8 IC62.8 J40.d32 R310.2 R311.2 R312.2 | length 80
  Top Layer w0.102: v1(41.148,22.53) 41.173,22.555 41.79,21.939 42.901,21.939 42.958,21.996 48.698,21.996 50.299,20.396 54.508,20.396 56.845,18.059 56.845,15.138 57.582,14.402 v2(58.268,14.402) ; J40.d32@52.532,12.606 53.668,13.741 56.389,13.741 57.328,13.741 57.633,13.437 58.268,13.437 ; v1(58.268,13.106) 58.268,13.437 ; IC61.8@68.871,11.838 v1(67.896,11.838) 67.818,11.76 C166.2@67.818,10.864 67.811,10.871 66.167,10.871 63.602,13.437 58.268,13.437 ; R312.2@70.917,29.629 70.866,29.578 R310.2@69.596,29.578 69.5,29.578 C164.2@68.605,28.684 68.951,28.338 IC60.8@68.951,27.144 68.951,25.689 69.205,25.435 69.502,25.435 69.796,25.141 70.71,25.141 v1(71.889,23.962) 71.889,21.066 71.585,20.761 R311.2@71.064,20.761
  Bottom Layer w0.102: C165.2@40.76,30.328 40.904,30.184 IC62.8@40.904,28.743 40.904,27.651 41.986,26.568 41.986,23.368 v1(41.148,22.53) ; v1(58.268,13.106) v2(58.268,14.402) ; v1(67.896,11.838) 67.896,13.147 67.368,13.675 67.368,13.962 66.251,15.08 66.251,17.967 71.889,23.606 v1(71.889,23.962)
CLK: IC1.9 IC56.11 IC57.11 IC58.11 IC59.11 | length 66.2
  Top Layer w0.102: IC56.11@18.596,26.787 20.117,26.787 20.398,26.507 20.398,24.805 22.784,22.419 32.791,22.419 33.401,23.028 48.955,23.028 49.565,22.419 v1(50.292,22.419) 57.794,22.419 v2(59.258,20.955) 59.299,20.955 59.879,20.375 60.212,20.375 60.448,20.611 60.448,20.748 61.697,21.996 61.697,25.899 62.234,26.436 IC59.11@63.086,26.436 ; v1(32.791,24.171) 32.791,24.333 32.456,24.668 32.456,24.674 32.207,24.923 32.207,26.559 32.435,26.787 IC57.11@33.328,26.787 ; IC58.11@48.586,26.686 49.733,26.686 50.267,26.153 v1(50.267,24.527)
  Bottom Layer w0.102: v1(32.766,22.368) 32.791,22.393 v1(32.791,24.171) ; v1(50.267,24.527) 50.267,22.444 v1(50.292,22.419) ; v2(59.258,20.955) 59.639,20.574 IC1.9@59.639,19.7
CLK_N: J41.14 R270.1 | length 21.4
  Top Layer w0.102: J41.14@16.116,77.905 16.116,79.121 v1(16.33,79.335)
  Bottom Layer w0.102: R270.1@13.157,63.513 12.814,63.856 12.814,64.402 11.746,65.47 11.746,66.791 12.321,67.367 12.321,68.629 12.276,68.674 12.276,75.344 13.995,77.064 13.995,78.08 13.797,78.278 13.797,78.983 14.129,79.316 15.428,79.316 15.488,79.256 16.251,79.256 v1(16.33,79.335)
CLK_P: J41.12 R273.2 | length 21.4
  Top Layer w0.102: v1(15.681,79.722) 15.664,79.705 15.664,79.15 15.716,79.098 J41.12@15.716,77.905
  Bottom Layer w0.102: R273.2@12.268,63.513 12.548,63.792 12.548,64.291 11.479,65.36 11.479,66.902 12.054,67.477 12.054,68.518 12.009,68.564 12.009,75.454 13.729,77.174 13.729,77.969 13.53,78.168 13.53,79.094 14.018,79.582 15.541,79.582 v1(15.681,79.722)
CLK_VADJ: IC1.3 J40.h38 | length 2
  Top Layer w0.152: v2(59.563,17.196) 60.053,17.686 J40.h38@60.152,17.686
  Bottom Layer w0.152: v2(59.563,17.196) 59.639,17.272 IC1.3@59.639,18.4
CON1_N1: C141A.1 R246A.1 R267.2 R268.1 | length 2.8
  Top Layer w0.102: R267.2@9.373,66.205 R268.1@10.287,66.205 10.287,65.266 R246A.1@10.304,65.25 9.409,65.25 C141A.1@9.389,65.23
CON1_N2: C141B.1 R246B.1 R272.2 R273.1 | length 18.4
  Top Layer w0.102: C141B.1@11.139,47.98 11.159,48 R246B.1@12.054,48 v1@12.054,48.602
  Bottom Layer w0.102: v1(12.04,48.616) 12.319,48.895 12.319,49.138 13.119,49.938 13.119,52.235 13.106,52.248 13.106,54.585 12.903,54.788 12.903,60.558 12.586,60.875 12.586,62.255 R273.1@12.268,62.573 12.738,63.043 13.183,63.043 13.21,63.07 13.731,63.07 R272.2@14.072,63.411
CON1_N3: C141C.1 R246C.1 R277.2 R278.1 | length 2.8
  Top Layer w0.102: R277.2@13.132,66.205 14.021,66.205 14.021,65.282 R246C.1@14.054,65.25 13.159,65.25 C141C.1@13.139,65.23
CON1_N4: C141D.1 R246D.1 R282.2 R283.1 | length 15.5
  Top Layer w0.102: C141D.1@14.889,47.98 14.909,48 R246D.1@15.804,48 v1@15.804,48.602
  Bottom Layer w0.102: v1(15.79,48.616) 16.075,48.901 16.075,49.336 16.853,50.113 16.853,55.081 16.711,55.223 16.711,61.597 R283.1@16.383,61.925
CON1_N5: C141E.1 R246E.1 R287.2 R288.1 | length 2.8
  Top Layer w0.102: C141E.1@16.889,65.23 16.909,65.25 R246E.1@17.804,65.25 17.805,65.251 17.805,66.205 R287.2@16.891,66.205
CON1_N6: C141F.1 J42.40 R246F.1 | length 37.4
  Top Layer w0.102: C141F.1@18.639,47.98 18.659,48 R246F.1@19.554,48 v1@19.554,48.602
  Bottom Layer w0.102: v1(19.54,48.616) 19.825,48.901 19.825,49.285 20.561,50.021 20.561,55.123 20.461,55.223 20.461,63.536 23.258,66.332 25.692,66.332 31.191,71.831 31.191,73.076 30.64,73.627 30.64,74.248 31.037,74.645 31.058,74.645 31.293,74.879 31.293,75.641 31.718,76.066 J42.40@31.718,77.467
CON1_N7: C141G.1 J42.41 R246G.1 | length 19.7
  Top Layer w0.102: C141G.1@20.639,65.23 21.534,65.23 R246G.1@21.554,65.25 21.554,65.608 21.88,65.934 21.88,66.227 23.662,68.008 28.283,68.008 32.487,72.212 32.487,73.44 32.24,73.687 32.24,74.282 32.795,74.837 32.795,75.398 32.518,75.675 J42.41@32.518,76.317
CON1_N8: C141H.1 J42.42 R246H.1 | length 35.1
  Top Layer w0.102: C141H.1@22.377,47.992 22.397,48.012 23.292,48.012 v1@23.292,48.614
  Bottom Layer w0.102: v1(23.278,48.628) 23.563,48.913 23.563,49.336 24.371,50.144 24.371,55.063 24.211,55.223 24.211,63.831 32.728,72.348 32.728,73.199 32.24,73.687 32.24,74.248 32.321,74.329 32.321,74.363 32.995,75.036 32.995,75.54 33.318,75.863 J42.42@33.318,77.467
CON1_N9: C141I.1 J42.43 R246I.1 | length 17.7
  Top Layer w0.102: C141I.1@24.389,65.23 24.409,65.25 R246I.1@25.304,65.25 25.304,65.608 25.623,65.928 25.623,66.412 26.407,67.196 29.197,67.196 34.087,72.085 34.087,73.44 33.84,73.687 33.84,74.282 34.395,74.837 34.395,75.398 34.118,75.675 J42.43@34.118,76.317
CON1_N10: C141J.1 J42.44 R246J.1 | length 34.5
  Top Layer w0.102: C141J.1@26.139,47.98 26.159,48 R246J.1@27.054,48 v1@27.054,48.602
  Bottom Layer w0.102: v1(27.04,48.616) 27.325,48.901 27.325,49.285 28.054,50.014 28.054,55.13 27.961,55.223 27.961,63.873 33.028,68.94 32.981,68.986 32.981,69.361 33.246,69.626 33.621,69.626 33.668,69.58 34.392,70.303 34.392,73.135 33.84,73.687 33.84,74.248 33.921,74.329 33.921,74.363 34.62,75.062 34.62,75.59 34.918,75.888 J42.44@34.918,77.467
CON1_N11: C141K.1 J42.45 R246K.1 | length 15.2
  Top Layer w0.102: C141K.1@28.139,65.23 28.159,65.25 R246K.1@29.054,65.25 29.054,65.608 29.38,65.934 29.38,66.231 35.712,72.564 35.712,73.415 35.44,73.687 35.44,74.282 35.995,74.837 35.995,75.398 35.718,75.675 J42.45@35.718,76.317
CON1_N12: C141L.1 J42.46 R246L.1 | length 33.2
  Top Layer w0.102: C141L.1@29.877,47.992 29.897,48.012 30.792,48.012 v1@30.792,48.614
  Bottom Layer w0.102: v1(30.778,48.628) 31.063,48.913 31.063,49.336 31.813,50.086 31.813,55.12 31.711,55.223 31.711,63.991 35.89,68.17 35.89,73.237 35.521,73.606 35.44,73.687 35.44,74.248 35.521,74.329 35.521,74.363 36.195,75.037 36.195,75.565 36.518,75.888 J42.46@36.518,77.467
CON1_N13: C141M.1 J42.47 R246M.1 | length 14.3
  Top Layer w0.102: C141M.1@31.889,65.23 31.909,65.25 R246M.1@32.804,65.25 32.804,65.608 33.13,65.934 33.13,66.984 37.338,71.192 37.338,73.389 37.04,73.687 37.04,74.282 37.595,74.837 37.595,76.04 J42.47@37.318,76.317
CON1_N14: C141N.1 J42.48 R246N.1 | length 32.4
  Top Layer w0.102: C141N.1@33.639,47.98 33.659,48 R246N.1@34.554,48 v1@34.554,48.602
  Bottom Layer w0.102: v1(34.54,48.616) 34.825,48.901 34.825,49.437 35.522,50.134 35.522,55.162 35.461,55.223 35.461,55.818 35.522,55.879 35.522,56.508 35.512,56.518 35.512,57.114 35.522,57.123 35.522,64.753 37.617,66.849 37.617,73.11 37.121,73.606 37.04,73.687 37.04,74.248 37.121,74.329 37.77,74.978 37.77,75.512 38.118,75.86 J42.48@38.118,77.467
CON1_N15: C141O.1 J42.49 R246O.1 | length 13.4
  Top Layer w0.102: C141O.1@35.639,65.23 35.659,65.25 R246O.1@36.554,65.25 36.554,65.608 36.88,65.934 36.88,67.661 38.837,69.618 38.837,73.49 38.64,73.687 38.64,74.282 39.195,74.837 39.195,75.398 38.918,75.675 J42.49@38.918,76.317
CON1_N16: C141P.1 J42.50 R246P.1 | length 31.6
  Top Layer w0.102: C141P.1@37.389,47.98 37.409,48 R246P.1@38.304,48 v1@38.304,48.602
  Bottom Layer w0.102: v1(38.29,48.616) 38.575,48.901 38.575,49.285 39.408,50.118 39.408,55.026 39.211,55.223 39.211,73.116 38.721,73.606 38.64,73.687 38.64,74.248 38.721,74.329 39.37,74.978 39.37,75.512 39.718,75.86 J42.50@39.718,77.467
CON1_N17: C141Q.1 J42.53 R246Q.1 | length 13.3
  Top Layer w0.102: C141Q.1@39.389,65.23 39.909,65.23 39.929,65.25 R246Q.1@40.304,65.25 40.304,65.608 40.63,65.934 40.63,68.693 42.177,70.24 42.177,73.35 41.84,73.687 41.84,74.282 42.395,74.837 42.395,76.04 J42.53@42.118,76.317
CON1_N18: C141R.1 J42.54 R246R.1 | length 31.7
  Top Layer w0.102: C141R.1@41.127,47.992 41.147,48.012 42.042,48.012 v1@42.042,48.614
  Bottom Layer w0.102: v1(42.028,48.628) 42.313,48.913 42.313,49.183 43.04,49.91 43.04,55.144 42.961,55.223 42.961,64.688 42.329,65.32 42.329,73.198 41.84,73.687 41.84,74.248 41.921,74.329 41.921,74.363 42.395,74.837 42.395,74.93 42.596,75.131 42.596,75.59 42.918,75.912 J42.54@42.918,77.467
CON1_N19: C141S.1 J42.55 R246S.1 | length 12.9
  Top Layer w0.102: C141S.1@43.139,65.23 43.159,65.25 R246S.1@44.054,65.25 44.054,65.608 44.379,65.933 44.379,69.109 43.752,69.736 43.752,73.376 43.44,73.687 43.44,74.282 43.995,74.837 43.995,76.04 J42.55@43.718,76.317
CON1_N20: C141T.1 J42.56 R246T.1 | length 32.6
  Top Layer w0.102: C141T.1@44.889,47.98 44.909,48 R246T.1@45.804,48 v1@45.804,48.602
  Bottom Layer w0.102: J42.56@44.518,77.467 44.518,75.836 44.171,75.489 44.171,75.012 43.521,74.363 43.521,74.329 43.44,74.248 43.44,73.687 43.98,73.147 43.98,66.361 46.711,63.63 46.711,55.223 46.799,55.134 46.799,50.187 46.075,49.463 46.075,48.901 v1(45.79,48.616)
CON1_N21: C141U.1 J42.57 R246U.1 | length 13.8
  Top Layer w0.102: J42.57@45.318,76.317 45.595,76.04 45.595,74.837 45.04,74.282 45.04,73.687 45.377,73.35 45.377,70.146 48.13,67.393 48.13,65.934 47.804,65.608 R246U.1@47.804,65.25 47.422,65.25 47.402,65.23 C141U.1@46.889,65.23
CON1_N22: C141V.1 J42.58 R246V.1 | length 33.6
  Top Layer w0.102: C141V.1@48.639,47.98 48.659,48 R246V.1@49.554,48 v1@49.554,48.602
  Bottom Layer w0.102: J42.58@46.118,77.467 46.118,75.836 45.771,75.489 45.771,75.08 45.595,74.905 45.595,74.837 45.121,74.363 45.121,74.329 45.04,74.248 45.04,73.687 45.555,73.172 45.555,69.99 50.461,65.083 50.461,55.223 50.584,55.1 50.584,49.942 49.825,49.183 49.825,48.901 v1(49.54,48.616)
CON1_N23: C141W.1 J42.59 R246W.1 | length 14.6
  Top Layer w0.102: J42.59@46.918,76.317 46.918,75.675 47.195,75.398 47.195,74.837 46.64,74.282 46.64,73.197 46.825,73.013 46.825,71.543 51.88,66.488 51.88,65.934 51.554,65.608 R246W.1@51.554,65.25 51.181,65.25 51.161,65.23 C141W.1@50.639,65.23
CON1_N24: C141X.1 J42.60 R246X.1 | length 34.4
  Top Layer w0.102: C141X.1@52.377,47.992 52.397,48.012 53.292,48.012 v1@53.292,48.614
  Bottom Layer w0.102: J42.60@47.718,77.467 47.718,75.886 47.44,75.609 47.44,75.228 47.32,75.108 47.32,74.962 46.721,74.363 46.721,74.329 46.64,74.248 46.64,73.687 46.718,73.609 47.13,73.197 47.13,69.761 54.211,62.679 54.211,55.223 54.292,55.141 54.292,50.039 53.563,49.31 53.563,48.913 v1(53.278,48.628)
CON1_N25: C141Y.1 J42.61 R246Y.1 | length 16.2
  Top Layer w0.102: J42.61@48.518,76.317 48.518,75.675 48.795,75.398 48.795,74.837 48.24,74.282 48.24,72.791 48.651,72.38 48.651,72.346 54.376,66.621 55.502,66.621 55.63,66.493 55.63,65.934 55.304,65.608 R246Y.1@55.304,65.25 54.409,65.25 C141Y.1@54.389,65.23
CON1_N26: C141Z.1 J42.62 R246Z.1 | length 37
  Top Layer w0.102: C141Z.1@56.139,47.98 56.159,48 R246Z.1@57.054,48 v1@57.054,48.602
  Bottom Layer w0.102: J42.62@49.318,77.467 49.318,75.835 48.997,75.514 48.997,75.038 48.321,74.363 48.321,74.329 48.24,74.248 48.24,73.687 48.755,73.172 48.755,69.867 54.754,63.868 57.624,63.868 57.883,63.609 57.883,59.646 57.883,59.378 57.961,59.3 57.961,55.223 58.026,55.158 58.026,49.96 57.325,49.259 57.325,48.901 v1(57.04,48.616)
CON1_N27: C141[.1 J42.63 R246[.1 | length 18
  Top Layer w0.102: J42.63@50.118,76.317 50.118,75.675 50.395,75.398 50.395,74.837 49.84,74.282 49.84,72.969 55.049,67.76 56.086,67.76 57.136,66.71 58.758,66.71 59.38,66.088 59.38,65.919 59.054,65.592 R246[.1@59.054,65.25 58.159,65.25 C141[.1@58.139,65.23
CON1_N28: C141\.1 J42.64 R246\.1 | length 39
  Top Layer w0.102: C141\.1@59.889,47.98 59.909,48 R246\.1@60.804,48 v1@60.804,48.602
  Bottom Layer w0.102: J42.64@50.918,77.467 50.918,75.784 50.571,75.438 50.571,75.013 49.921,74.363 49.921,74.329 49.84,74.248 49.84,73.687 49.918,73.609 50.254,73.273 50.254,70.07 55.223,65.1 59.995,65.1 61.711,63.384 61.711,55.223 61.811,55.123 61.811,50.097 61.075,49.361 61.075,48.901 v1(60.79,48.616)
CON1_N29: C141].1 J42.65 R246].1 | length 20.6
  Top Layer w0.102: J42.65@51.718,76.317 51.718,75.675 51.995,75.398 51.995,74.837 51.44,74.282 51.44,72.439 53.623,70.256 55.239,68.64 56.425,68.64 57.314,67.751 58.939,67.751 59.584,67.107 62.509,67.107 63.13,66.486 63.13,65.934 62.804,65.608 R246].1@62.804,65.25 C141].1@61.909,65.25
CON1_N30: C141^.1 J42.66 R246^.1 | length 40.7
  Top Layer w0.102: C141^.1@63.627,47.992 63.647,48.012 64.542,48.012 v1@64.542,48.614
  Bottom Layer w0.102: J42.66@52.518,77.467 52.518,75.911 52.172,75.565 52.172,75.013 51.521,74.363 51.521,74.329 51.44,74.248 51.44,73.687 51.956,73.171 51.956,70.222 56.265,65.913 62.433,65.913 65.461,62.885 65.461,55.223 65.545,55.139 65.545,50.169 64.813,49.437 64.813,48.913 v1(64.528,48.628)
CON1_N31: C141_.1 J42.67 R246_.1 | length 22.5
  Top Layer w0.102: J42.67@53.318,76.317 53.318,75.675 53.595,75.398 53.595,74.837 53.04,74.282 53.04,72.998 57.763,68.275 65.075,68.275 66.88,66.47 66.88,65.934 66.554,65.608 R246_.1@66.554,65.25 66.534,65.23 C141_.1@65.639,65.23
CON1_N32: C141`.1 J42.68 R246`.1 | length 42.4
  Top Layer w0.102: C141`.1@67.389,47.98 67.409,48 R246`.1@68.304,48 v1@68.304,48.602
  Bottom Layer w0.102: J42.68@54.118,77.467 54.118,75.675 53.84,75.398 53.84,74.837 54.445,74.232 54.445,69.956 57.777,66.624 66.269,66.624 68.707,64.186 68.707,58.179 69.482,57.404 69.482,50.14 68.575,49.234 68.575,48.901 v1(68.29,48.616)
CON1_P1: C140A.1 R243A.1 R265.2 R266.1 | length 2.9
  Top Layer w0.102: R266.1@12.141,66.205 R265.2@11.201,66.205 11.201,65.271 R243A.1@11.223,65.249 11.243,65.229 C140A.1@12.162,65.229
CON1_P2: C140B.1 R243B.1 R270.2 R271.1 | length 18.5
  Top Layer w0.102: v1@12.973,48.609 R243B.1@12.973,47.999 12.993,47.979 C140B.1@13.912,47.979
  Bottom Layer w0.102: v1(12.878,48.616) 12.598,48.895 12.598,49.022 13.386,49.81 13.386,54.7 13.183,54.904 13.183,60.655 12.852,60.986 12.852,62.268 R270.2@13.157,62.573 13.388,62.804 13.841,62.804 13.928,62.89 13.945,62.89 14.023,62.969 14.569,62.969 R271.1@14.986,63.386
CON1_P3: C140C.1 R243C.1 R275.2 R276.1 | length 2.8
  Top Layer w0.102: R276.1@15.9,66.205 14.961,66.205 14.961,65.261 R243C.1@14.973,65.249 15.892,65.249 C140C.1@15.912,65.229
CON1_P4: C140D.1 R243D.1 R280.2 R281.1 | length 15.5
  Top Layer w0.102: v1@16.723,48.609 R243D.1@16.723,47.999 16.743,47.979 C140D.1@17.662,47.979
  Bottom Layer w0.102: v1(16.628,48.616) 16.342,48.901 16.342,49.225 17.12,50.003 17.12,55.191 16.978,55.333 16.978,61.58 R280.2@17.323,61.925
CON1_P5: C140E.1 R243E.1 R285.2 R286.1 | length 2.8
  Top Layer w0.102: R286.1@19.66,66.205 18.72,66.205 18.72,65.252 R243E.1@18.723,65.249 18.743,65.229 C140E.1@19.662,65.229
CON1_P6: C140F.1 J42.6 R243F.1 | length 34.7
  Top Layer w0.102: v1@20.473,48.609 R243F.1@20.473,47.999 20.493,47.979 C140F.1@21.412,47.979
  Bottom Layer w0.102: v1(20.378,48.616) 20.092,48.901 20.092,49.174 20.828,49.91 20.828,55.233 20.728,55.333 20.728,63.425 23.368,66.065 25.803,66.065 31.458,71.721 31.458,72.898 32.037,73.477 32.037,74.332 32.118,74.413 J42.6@32.118,75.117
CON1_P7: C140G.1 J42.7 R243G.1 | length 17
  Top Layer w0.102: C140G.1@23.412,65.229 22.493,65.229 R243G.1@22.473,65.249 22.473,65.608 22.146,65.934 22.146,66.116 23.772,67.742 28.393,67.742 32.753,72.102 32.753,73.803 J42.7@32.918,73.967
CON1_P8: C140H.1 J42.8 R243H.1 | length 32.4
  Top Layer w0.102: v1@24.211,48.621 24.211,48.011 R243H.1@24.223,47.999 24.231,47.991 C140H.1@25.15,47.991
  Bottom Layer w0.102: v1(24.116,48.628) 23.83,48.913 23.83,49.225 24.638,50.033 24.638,55.173 24.478,55.333 24.478,63.721 32.995,72.238 32.995,72.746 33.637,73.388 33.637,74.332 33.718,74.413 J42.8@33.718,75.117
CON1_P9: C140I.1 J42.9 R243I.1 | length 15
  Top Layer w0.102: C140I.1@27.162,65.229 26.243,65.229 R243I.1@26.223,65.249 26.223,65.608 25.903,65.928 25.903,66.314 26.518,66.929 29.308,66.929 34.353,71.975 34.353,73.803 J42.9@34.518,73.967
CON1_P10: C140J.1 J42.10 R243J.1 | length 31.8
  Top Layer w0.102: v1@27.973,48.609 R243J.1@27.973,47.999 27.993,47.979 C140J.1@28.912,47.979
  Bottom Layer w0.102: v1(27.878,48.616) 27.592,48.901 27.592,49.174 28.321,49.903 28.321,55.24 28.228,55.333 28.228,63.763 33.217,68.751 33.246,68.721 33.621,68.721 33.886,68.986 33.886,69.361 33.856,69.391 34.658,70.193 34.658,72.987 35.237,73.566 35.237,74.332 35.318,74.413 J42.10@35.318,75.117
CON1_P11: C140K.1 J42.11 R243K.1 | length 12.5
  Top Layer w0.102: C140K.1@30.912,65.229 29.993,65.229 R243K.1@29.973,65.249 29.973,65.608 29.646,65.934 29.646,66.121 35.979,72.453 35.979,73.829 J42.11@36.118,73.967
CON1_P12: C140L.1 J42.12 R243L.1 | length 30.6
  Top Layer w0.102: v1@31.711,48.621 31.711,48.011 R243L.1@31.723,47.999 31.731,47.991 C140L.1@32.65,47.991
  Bottom Layer w0.102: v1(31.616,48.628) 31.33,48.913 31.33,49.225 32.08,49.975 32.08,55.231 31.978,55.333 31.978,63.88 36.157,68.059 36.157,72.924 36.837,73.604 36.837,74.332 36.918,74.413 J42.12@36.918,75.117
CON1_P13: C140M.1 J42.13 R243M.1 | length 11.6
  Top Layer w0.102: C140M.1@34.662,65.229 33.743,65.229 R243M.1@33.723,65.249 33.723,65.608 33.396,65.934 33.396,66.874 37.605,71.082 37.605,73.855 J42.13@37.718,73.967
CON1_P14: C140N.1 J42.14 R243N.1 | length 29.7
  Top Layer w0.102: v1@35.473,48.609 R243N.1@35.473,47.999 35.493,47.979 C140N.1@36.412,47.979
  Bottom Layer w0.102: v1(35.378,48.616) 35.092,48.901 35.092,49.327 35.789,50.023 35.789,55.272 35.728,55.333 35.728,55.708 35.789,55.768 35.789,56.619 35.779,56.628 35.779,57.003 35.789,57.013 35.789,64.643 37.884,66.739 37.884,73.012 38.437,73.565 38.437,74.332 38.518,74.413 J42.14@38.518,75.117
CON1_P15: C140O.1 J42.15 R243O.1 | length 10.7
  Top Layer w0.102: C140O.1@38.412,65.229 38.049,65.229 38.029,65.249 R243O.1@37.473,65.249 37.473,65.608 37.146,65.934 37.146,67.55 39.103,69.507 39.103,73.753 J42.15@39.318,73.967
CON1_P16: C140P.1 J42.16 R243P.1 | length 28.9
  Top Layer w0.102: v1@39.223,48.609 R243P.1@39.223,47.999 39.243,47.979 C140P.1@40.162,47.979
  Bottom Layer w0.102: v1(39.128,48.616) 38.842,48.901 38.842,49.174 39.675,50.007 39.675,55.136 39.478,55.333 39.478,72.93 40.037,73.489 40.037,74.332 40.118,74.413 J42.16@40.118,75.117
CON1_P17: C140Q.1 J42.19 R243Q.1 | length 10.5
  Top Layer w0.102: C140Q.1@42.162,65.229 41.783,65.229 41.763,65.249 R243Q.1@41.223,65.249 41.223,65.608 40.896,65.934 40.896,68.582 42.443,70.129 42.443,73.893 J42.19@42.518,73.967